# Altium PCB Power supply.PcbDoc
Units mm, origin at the board's own origin, x right, y up, seen from the top; angles counter-clockwise.
Board outline 94.6 x 43.6 mm, 2 copper layers (Top Layer, Bottom Layer); 23 components, 10 nets, 49 pads, 4 vias.
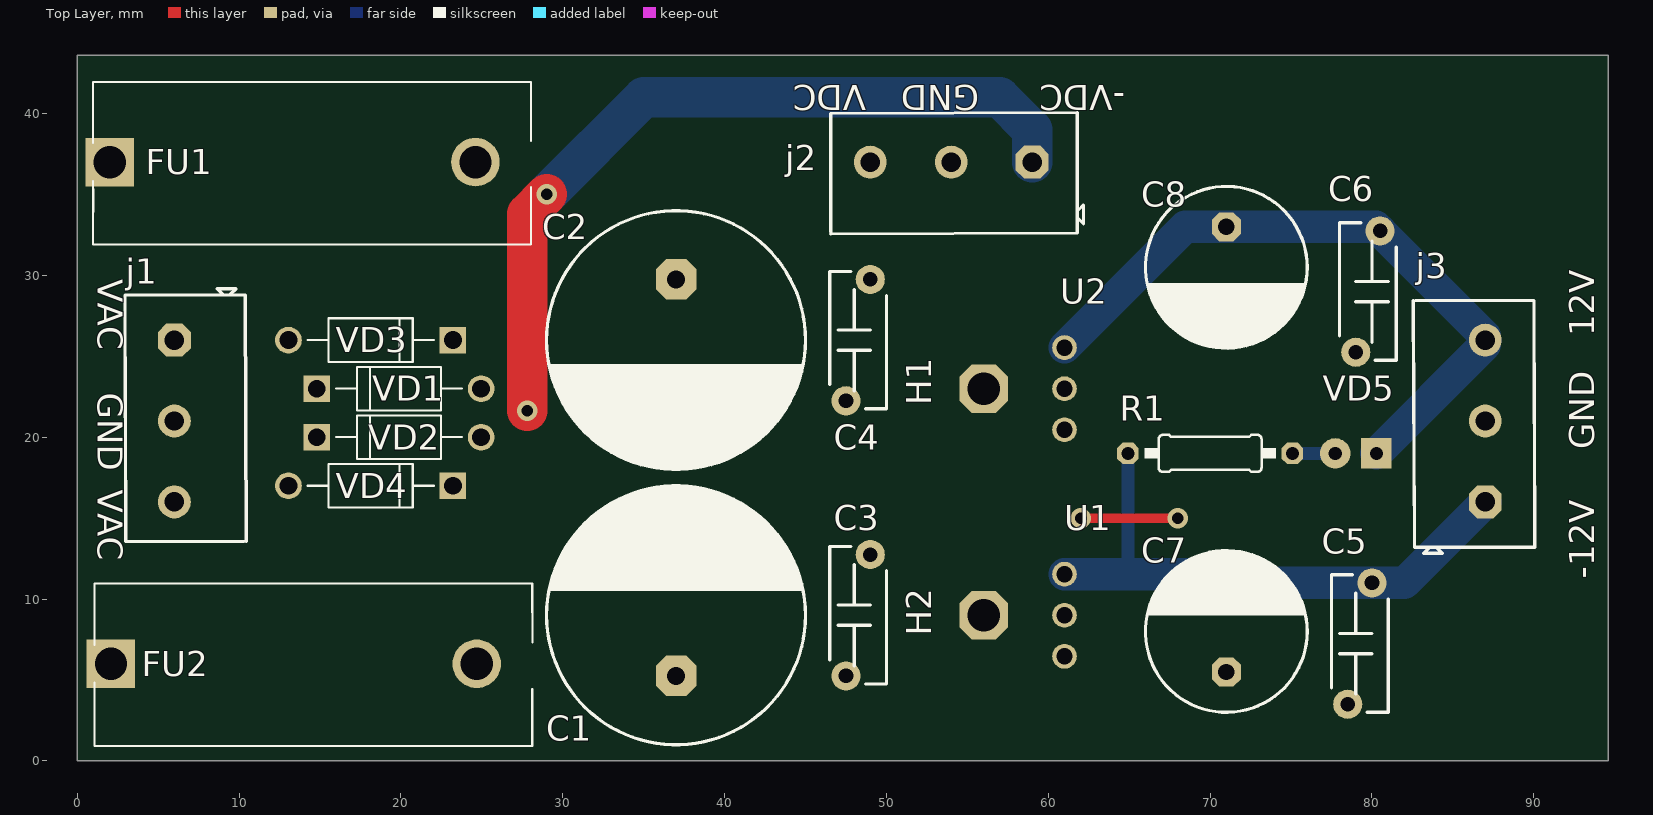
[diagram p0: Top Layer view]
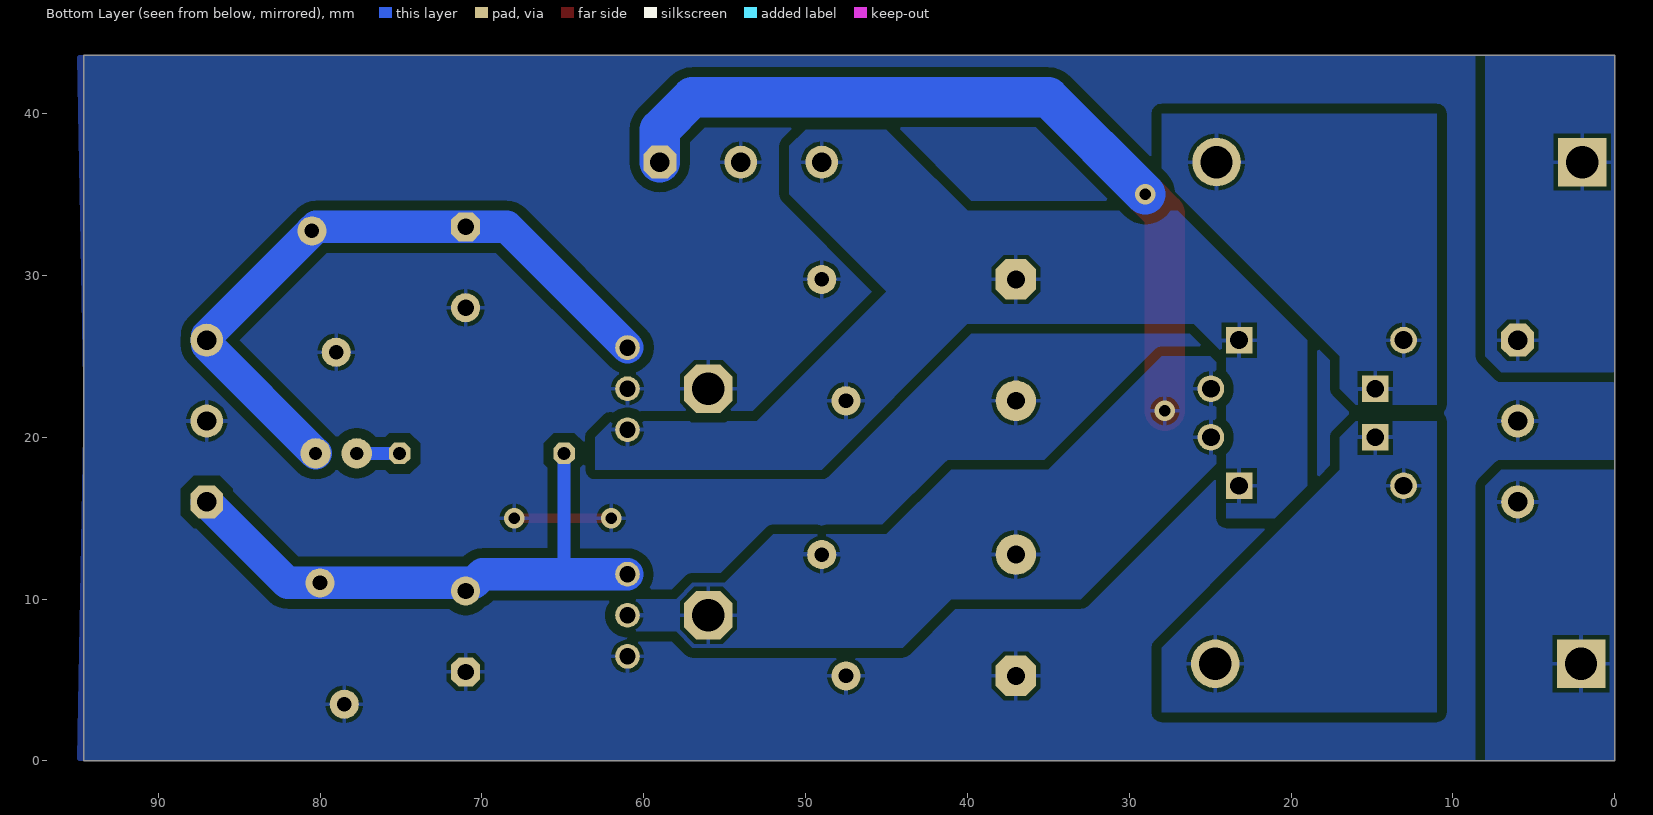
[diagram p1: Bottom Layer view, seen from below]

## Layer stack, top to bottom
Top Solder: solder mask 0.0102, Solder Resist, Dk 3.5
Top Layer: signal copper 0.0356
Dielectric 1: dielectric 0.32, FR-4, Dk 4.8
Bottom Layer: signal copper 0.0356
Bottom Solder: solder mask 0.0102, Solder Resist, Dk 3.5

## Board outline
0,0 94.6,0 94.6,43.6 0,43.6

## Design rules (kind name [scope] priority, off if disabled: settings)
Clearance [All] p1: gap=0.6 ignorepadtopadclearanceinfootprint=FALSE
HoleSize [All] p1: absolutevalues=TRUE maxlimit=4 minlimit=0.6 maxpercent=80.000 minpercent=20.000
PlaneConnect [All] p1: planeconnectstyle=Relief reliefexpansion=0.508 reliefentries=4 reliefconductorwidth=0.6 reliefairgap=0.254
PolygonConnect [All] p1: connectstyle=Relief reliefconductorwidth=0.254 reliefentries=4 polygonreliefangle="90 Angle" airgapwidth=0.254
RoutingVias [All] p1: holewidth=0.8 width=1.2 viastyle="Through Hole" minholewidth=0.6 minwidth=0.8 maxholewidth=3 maxwidth=4
SolderMaskExpansion [All] p1: expansion=0.102 istentingtop=FALSE
Width [All] p1: maxlimit=3 minlimit=0.6 preferedwidth=0.8
28 further rules are at their usual default settings.

## Components (designator, comment, footprint, x,y, rotation, side; value= is the part's Value field where it differs from the comment)
C1 "Aluminium capacitor, 2200μF, 50V, ±20%, 54mOhm, 14x10x5 mm, -55...+105°C" "CAP Electrolytic TH D16C7.5H31.5" 37,9 r90 top
C2 "Aluminium capacitor, 2200μF, 50V, ±20%, 54mOhm, 14x10x5 mm, -55...+105°C" "CAP Electrolytic TH D16C7.5H31.5" 37,26 r270 top
C3 "Film capacitor, 220nF, 450VDC, ±10%, 10.9mOhm, 31.5x15 mm, -40...+105°C" "CAP Ceramic TH AY2102M29Y5US63L7" 48,9 r90 top
C4 "Film capacitor, 220nF, 450VDC, ±10%, 10.9mOhm, 31.5x15 mm, -40...+105°C" "CAP Ceramic TH AY2102M29Y5US63L7" 48,26 r90 top
C5 "Film capacitor, 100nF, 450VDC, ±10%, 10.9mOhm, 31.5x15 mm, -40...+105°C" "CAP Ceramic TH AY2102M29Y5US63L7" 79,7.25 r90 top
C6 "Film capacitor, 100nF, 450VDC, ±10%, 10.9mOhm, 31.5x15 mm, -40...+105°C" "CAP Ceramic TH AY2102M29Y5US63L7" 80,29 r270 top
C7 "Aluminium capacitor, 470μF, 16V, ±20%, 54mOhm, 14x10x5 mm, -55...+105°C" "CAP Electrolytic TH D10C5H12.5" 71,8 r90 top
C8 "Aluminium capacitor, 470μF, 16V, ±20%, 54mOhm, 14x10x5 mm, -55...+105°C" "CAP Electrolytic TH D10C5H12.5" 71,30.5 r270 top
FU1 "Electromechanics relay, 250VAC, 3A, 5x20mm," "FUSE TH BLX-A" 12.92,37 r0 top
FU2 "Electromechanics relay, 250VAC, 3A, 5x20mm," "FUSE TH BLX-A" 13,6 r0 top
H1 "Heatsink 1 pad transistor TO220" "Heatsink 1 pad SK95-2M3" 58.54,23 r90 top
H2 "Heatsink 1 pad transistor TO220" "Heatsink 1 pad SK95-2M3" 58.54,9 r90 top
j1 "screw terminal 1x3" "screw terminal 1x3" 6,26 r0 top
j2 "screw terminal 1x3" "screw terminal 1x3" 59,37 r270 top
j3 "screw terminal 1x3" "screw terminal 1x3" 87,16 r180 top
R1 "Resistor film, 2.7kR, ±5%, 0201, 0.25W, -55...+125°C" "RES TH 0.25W H 0207$10" 70,19 r0 top
U1 "7912" "Linear reagulator TH TO220V" 58.46,9 r90 top
U2 "7812" "Linear reagulator TH TO220V" 58.46,23 r90 top
VD1 "Single diode, 75V, 150mA, 1V, 4ns, SOD-323, -55...+150°C" "Diode TH DO-41 (h) (1n4007)" 20,23 r0 top
VD2 "Single diode, 75V, 150mA, 1V, 4ns, SOD-323, -55...+150°C" "Diode TH DO-41 (h) (1n4007)" 20,20 r0 top
VD3 "Single diode, 75V, 150mA, 1V, 4ns, SOD-323, -55...+150°C" "Diode TH DO-41 (h) (1n4007)" 18,26 r180 top
VD4 "Single diode, 75V, 150mA, 1V, 4ns, SOD-323, -55...+150°C" "Diode TH DO-41 (h) (1n4007)" 18,17 r180 top
VD5 "LED, Green, *, *, *, -55...+150°C" "LED TH 5MM" 79,19 r180 top

## Footprints (in the part's own frame and the unit in brackets; to place one, negate y for a bottom-side part, rotate by r counter-clockwise, add the part's x,y. Pads: shape width x height; smd on the part's side, far side on the other; paste and mask are expansions set on the pad)
"CAP Ceramic TH AY2102M29Y5US63L7" [mm] "(220nF)"
  round 1.8 hole 0.9: 1(-3.75,0.5) 2(3.75,-1)
  silkscreen extent -4.25,-2 4.25,1.5, body extent -4.25,-2.8 4.35,2.2, height 10.75
"CAP Electrolytic TH D10C5H12.5" [mm]
  oct 1.8x1.8 hole 1: 1(-2.5,0)
  round 1.8 hole 1: 2(2.5,0)
  silkscreen extent -5,-5 5,5, body extent -5.25,-5.25 5.25,5.25, height 14.05
"CAP Electrolytic TH D16C7.5H31.5" [mm]
  oct 2.5x2.5 hole 1.1: 1(-3.75,0)
  round 2.5 hole 1.1: 2(3.75,0)
  silkscreen extent -8,-8 8,8, body extent -8.25,-8.25 8.25,8.25, height 33.5
"Diode TH DO-41 (h) (1n4007)" [mm]
  round 1.65 hole 1.1: 1(4.953,0)
  rect 1.65x1.65 hole 1.1: 2(-5.207,0)
  silkscreen extent -4.03,-1.35 3.77,1.35, body extent -5.64,-1.36 5.39,1.36, height 2.72
"FUSE TH BLX-A" [mm]
  rect 3x3 hole 2: 1(-10.92,0)
  round 3 hole 2: 2(11.684,0)
  silkscreen extent -11.94,-5.08 15.13,4.95, body extent -11.85,-5.05 15.15,4.95, height 13.1
"Heatsink 1 pad SK95-2M3" [mm]
  oct 3x3 / inner round 2.772 / far side oct 3x3 hole 2: 1(0,2.54)
  body extent -6.31,-1.42 6.31,5.09, height 25
"LED TH 5MM" [mil]
  rect 74x74 / inner round 74 / far side round 74 hole 32: 1(-50,0)
  round 74 hole 32: 2(50,0)
  body extent -118,-118 98,118, height 346
"Linear reagulator TH TO220V" [mil]
  round 60 hole 40: 1(-100,-100) 2(0,-100) 3(100,-100)
  body extent -207,-168 207,15, height 768
"RES TH 0.25W H 0207$10" [mil]
  oct 52x52 / inner round 48.04 / far side oct 52x52 hole 32: 1(-200,0) 2(200,0)
  silkscreen extent -159,-45 159,45, body extent -209,-48 209,50, height 89
"screw terminal 1x3" [mil]
  oct 80x80 hole 47.24: 1(0,0)
  round 80 hole 47.24: 2(0,-196.85) 3(0,-393.7)
  silkscreen extent -120,-490 175,125, body extent -125,-487 174,127, height 394

## Part data
C1 C2 C7 C8: library part "Capacitor Aluminium"
C3 C4 C5 C6: library part "Capacitor Film"
FU1 FU2: library part Fuse
j1 j2 j3: "PCB Terminal Block 3 Poles, 5 mm Pitch, 691101710003, Würth Elektronik"
R1: library part "Resistor Fixed"
U1: library part 79XX, "Negative VOLTAGE REGULATOR"
U2: library part 78XX, "Positive VOLTAGE REGULATOR"
VD1 VD2 VD3 VD4: library part "Diode single"
VD5: library part "LED single"

## Via types
v1: diameter 1.27, hole 0.711, Top Layer to Bottom Layer, 4 vias

## Nets (pads, with @x,y where several pads share a name; then routed paths per layer and width w, separated by ;. In a path a pad name is that pad's centre, name@x,y a point inside that pad or via, vN(x,y) a via of type N, cw(c..) or ccw(c..) an arc to the next point about the centre after c; other vN are vias at no path point)
GND: C1.1 C2.2 C3.1 C4.2 C5.1 C6.2 C7.1 C8.2 H1.1 j1.2 j2.2 j3.2 U1.1 U2.2 | length 6
  Top Layer w0.6: v1(62,15) v1(68,15)
NetC1_2: C1.2 C3.2 H2.1 j2.1 U1.2 VD1.1 VD2.1 | length 49.2
  Top Layer w2.5: v1(27.797,21.628) 27.797,33.797 v1(29,35)
  Bottom Layer w2.5: v1(29,35) 35,41 57,41 59,39 j2.1
NetC2_1: C2.1 C4.1 j2.3 U2.1 VD3.2 VD4.2
NetC5_2: C5.2 C7.2 j3.1 R1.1 U1.3 | length 35.8
  Bottom Layer w0.8: R1.1 64.92,11.62 65,11.54
  Bottom Layer w2: U1.3 65,11.54 69.96,11.54 70.5,11 82,11 j3.1
NetC6_1: C6.1 C8.1 j3.3 U2.3 VD5.1 | length 41.6
  Bottom Layer w2: U2.3 68.46,33 C6.1@80.25,33 ; VD5.1 86.984,25.714 86.984,25.984 j3.3 86.984,26.016 86.984,26.266 C6.1
NetFU1_1: FU1.1 j1.1
NetFU1_2: FU1.2 VD1.2 VD3.1
NetFU2_1: FU2.1 j1.3
NetFU2_2: FU2.2 VD2.2 VD4.1
NetR1_2: R1.2 VD5.2 | length 2.6
  Bottom Layer w0.8: R1.2 VD5.2

## Polygon pours and split planes (outlines as drawn)
GND on Bottom Layer "GND_L02_P008" (solid, pour order 8): 0,0 95,0 94.6,21.889 95,43.6 0,43.6
NetC1_2 on Bottom Layer "NETC1_2_L02_P006" (solid, pour order 6): 23,20 23,23 25,25 28,25 35,18 41,18 45,14 52,14 55,11 57,11 58,10 62,10 63,9 62,8 58,8 57,7 44,7 41,10 33,10
NetC2_1 on Bottom Layer "NETC2_1_L02_P007" (solid, pour order 7): 51,38 50,39 45,39 39,33 44,28 51,35
NetC2_1 on Bottom Layer "NETC2_1_L02_P005" (solid, pour order 5): 19,26 19,17 21,15 24,15 24,25 26,27 40,27 49,18 63,18 63,20 62,21 53,21 40,34 27,34
NetFU2_2 on Bottom Layer "NETFU2_2_L02_P003" (solid, pour order 3): 11,21 16,21 17,20 17,18 28,7 28,3 11,3
NetFU1_2 on Bottom Layer "NETFU1_2_L02_P002" (solid, pour order 2): 28,40 11,40 11,22 16,22 17,23 17,25 28,36
NetFU1_1 on Bottom Layer "NETFU1_1_L02_P001" (solid, pour order 1): 0,24 7,24 8,25 8,43.595 7.998,43.594 0.007,43.594
NetFU2_1 on Bottom Layer "NETFU2_1_L02_P000" (solid, pour order 0): 0,0 0,18 7,18 8,17 8,0

## Silkscreen, mask and mechanical layers (free items; w line width, h text height)
Top Overlay:
  text "VDC" at 48.746,41.746 h1.52 r180
  text "GND" at 55.746,41.746 h1.52 r180
  text "-VDC" at 64.746,41.746 h1.52 r180
  text "VAC" at 1.254,29.746 h1.52 r270
  text "12V" at 93.746,26.254 h1.52 r90
  text "GND" at 1.254,22.746 h1.52 r270
  text "GND" at 93.746,19.254 h1.52 r90
  text "VAC" at 1.254,16.746 h1.52 r270
  text "-12V" at 93.746,11.254 h1.52 r90

## Text inside footprints (layer, text, board x,y; h text height)
U1: Mechanical 3 "3" at 61.635,10.905 h1.97 r90; Mechanical 3 "2" at 61.635,8.365 h1.97 r90; Mechanical 3 "1" at 61.635,5.825 h1.97 r90
U2: Mechanical 3 "3" at 61.635,24.905 h1.97 r90; Mechanical 3 "2" at 61.635,22.365 h1.97 r90; Mechanical 3 "1" at 61.635,19.825 h1.97 r90